# Altium PCB CryPCB.PcbDoc
Units mm, origin at the board's own origin, x right, y up, seen from the top; angles counter-clockwise.
Board outline 80 x 100 mm, 2 copper layers (Top Layer, Bottom Layer); 11 components, 5 nets, 20 pads, 3 vias.
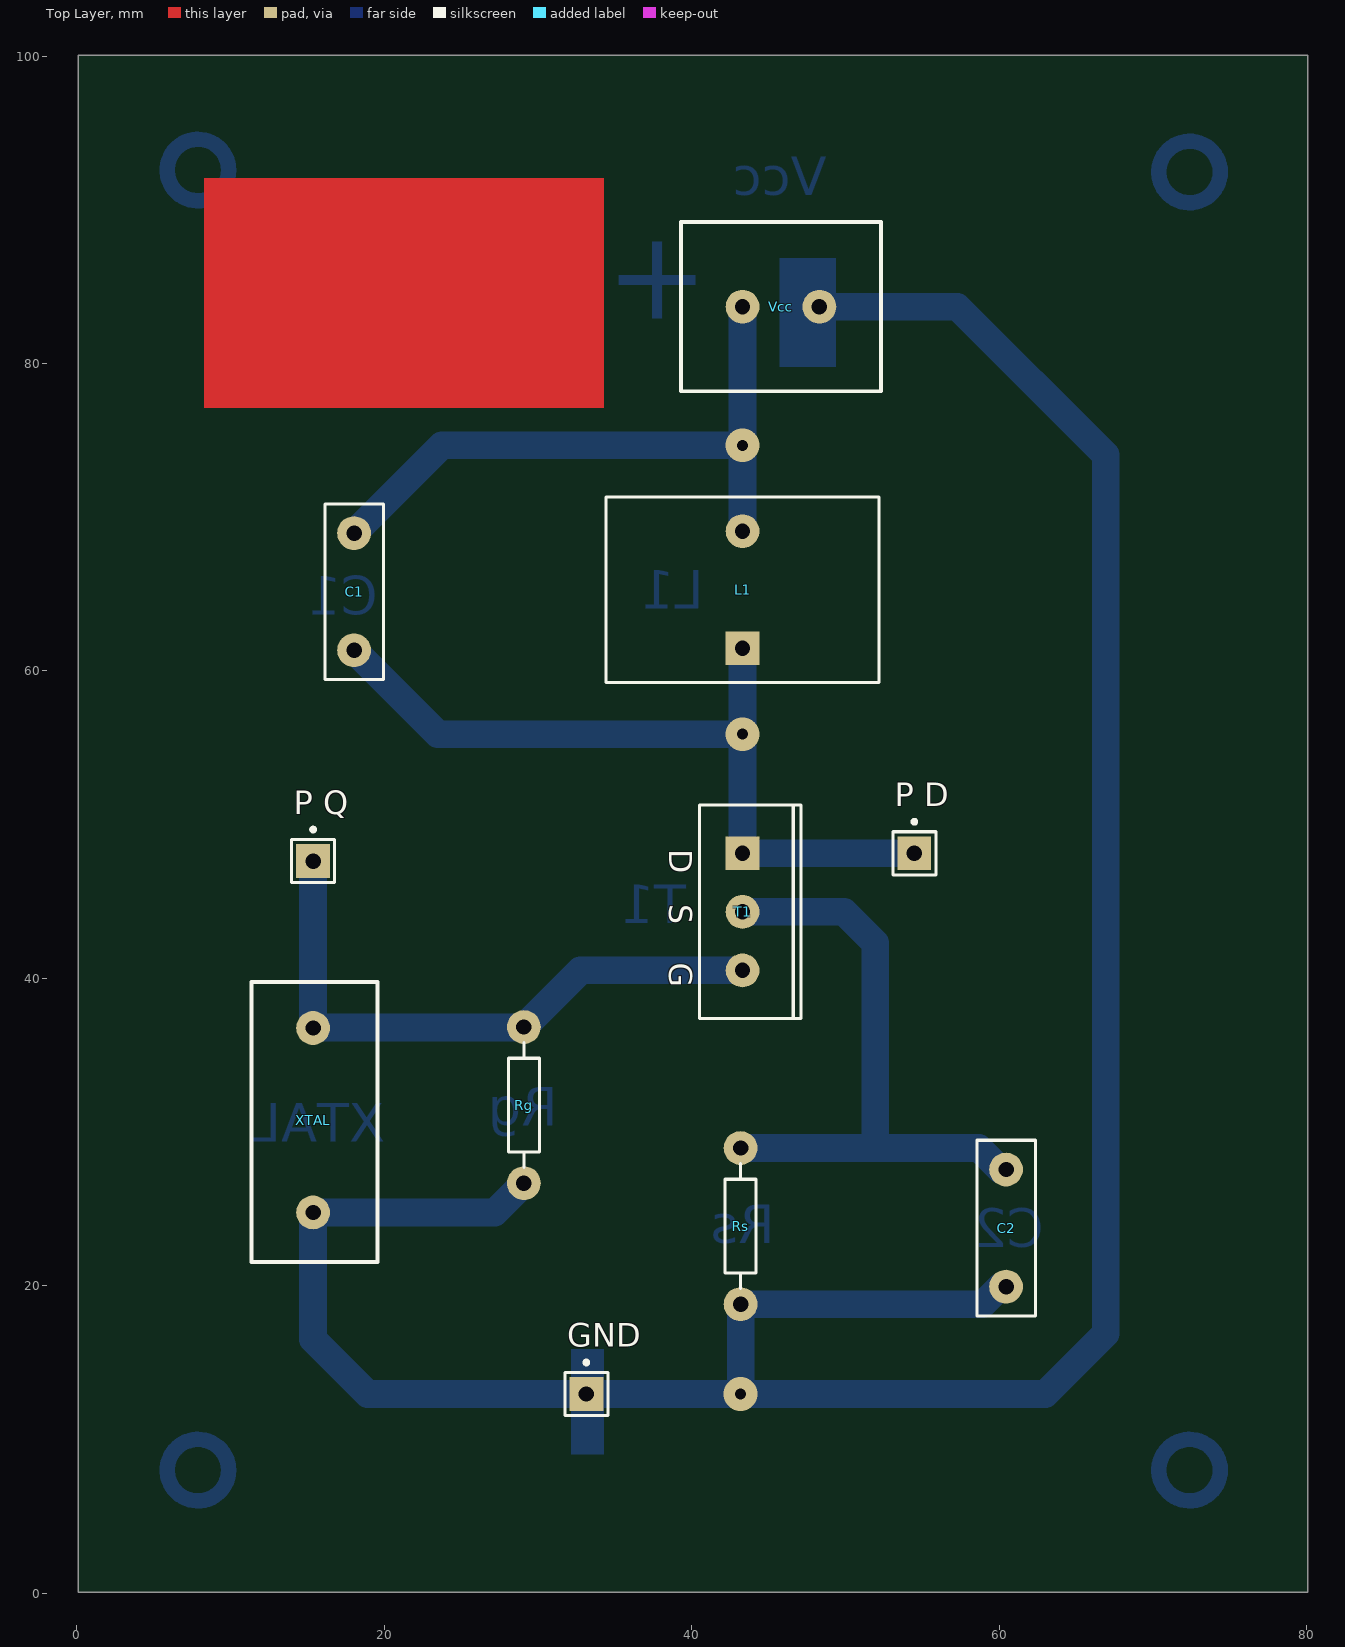
[diagram p0: Top Layer view]
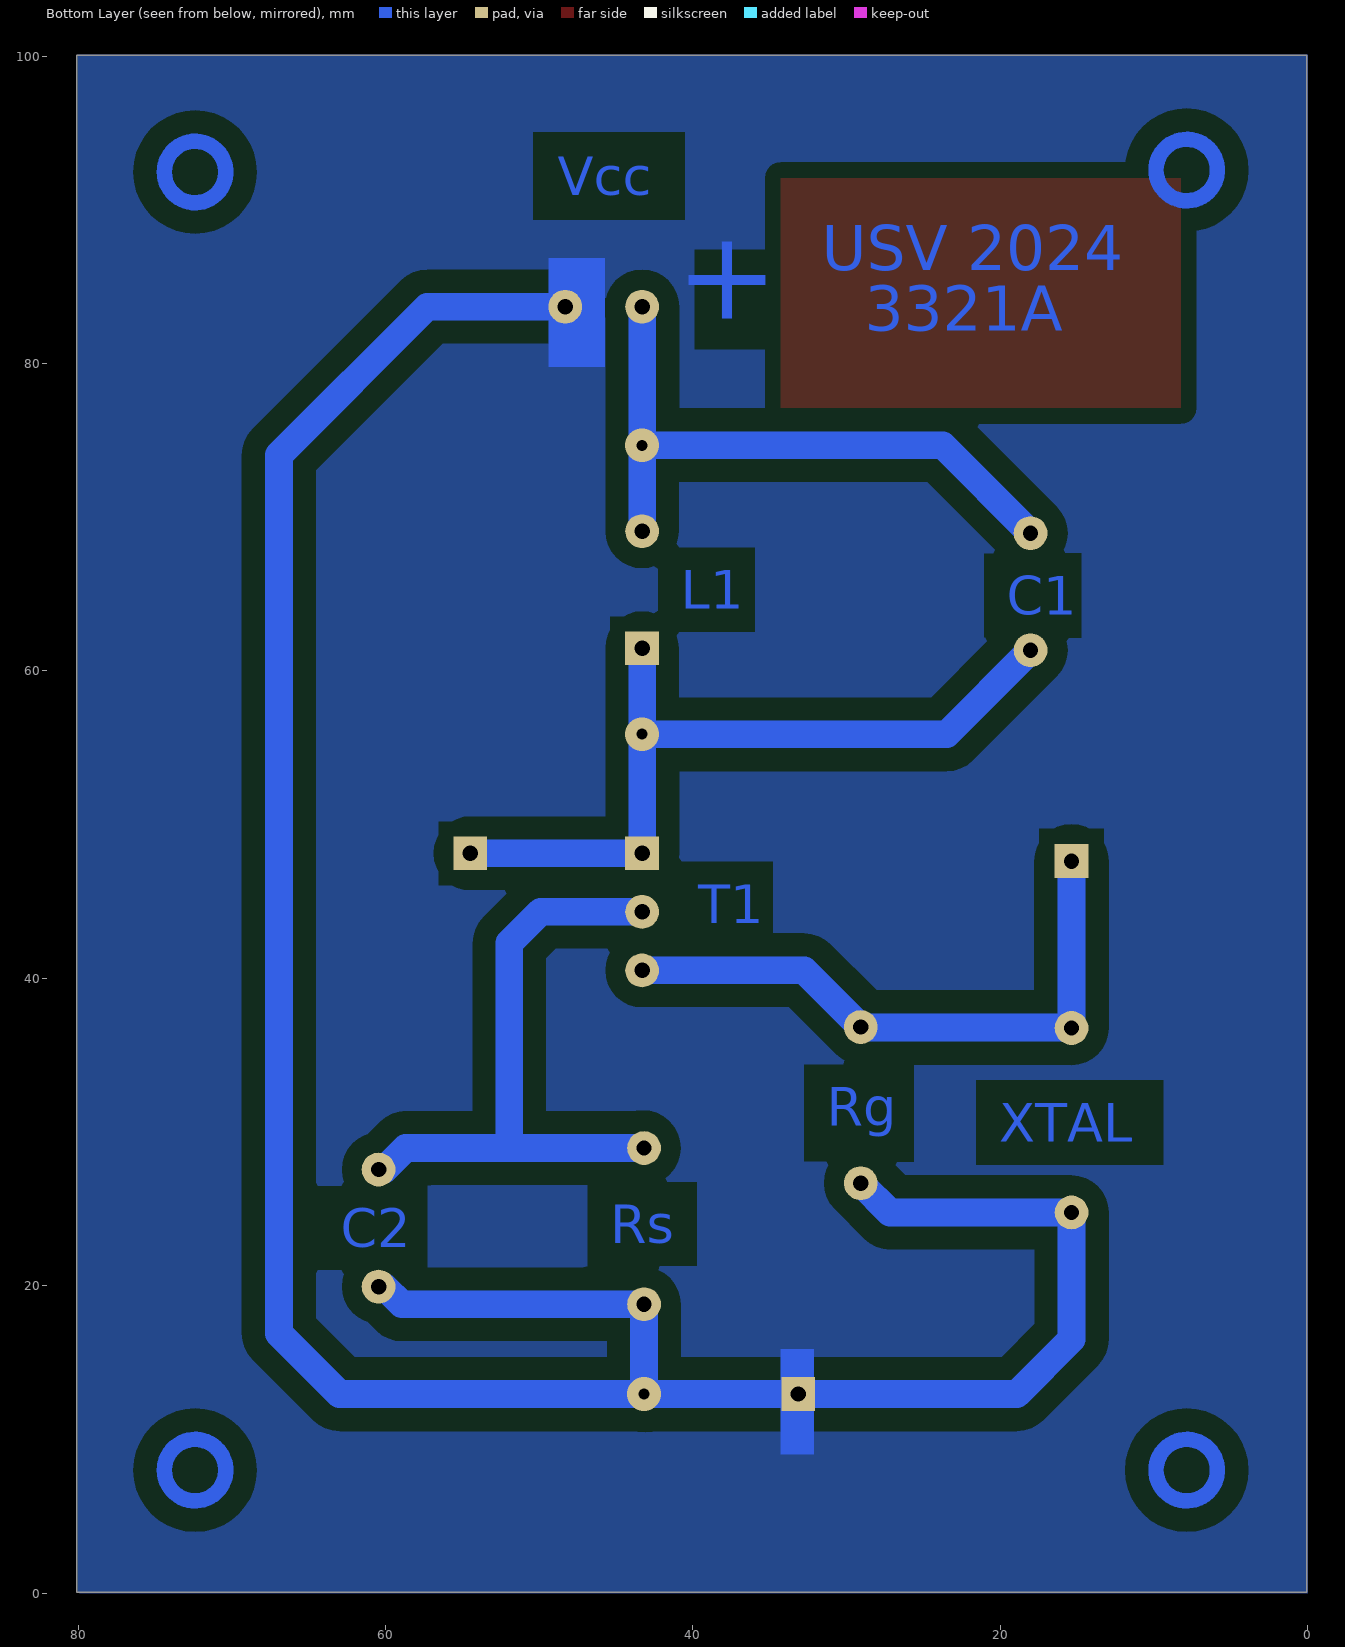
[diagram p1: Bottom Layer view, seen from below]

## Layer stack, top to bottom
Top Solder: solder mask 0.0102, Solder Resist, Dk 3.5
Top Layer: signal copper 0.0356
Dielectric 1: dielectric 0.32, FR-4, Dk 4.8
Bottom Layer: signal copper 0.0356
Bottom Solder: solder mask 0.0102, Solder Resist, Dk 3.5

## Board outline
0.08,0.041 0.08,100.041 80.08,100.041 80.08,0.041

## Design rules (kind name [scope] priority, off if disabled: settings)
Clearance [All] p1: gap=0.254 ignorepadtopadclearanceinfootprint=FALSE except(1: SMDPad-Fill SMDPad-Poly SMDPad-Region THPad-Fill THPad-Poly THPad-Region Via-Fill Via-Poly Via-Region Fill-Fill Fill-Poly Fill-Region Fill-Text Poly-Poly Poly-Region Poly-Text Region-Region Region-Text; 1.5: Arc-Fill Arc-Poly Arc-Region Track-Fill Track-Poly Track-Region)
PolygonConnect [All] p1: connectstyle=Relief reliefconductorwidth=0.254 reliefentries=4 polygonreliefangle="90 Angle" airgapwidth=0.254
RoutingVias [All] p1: holewidth=0.711 width=1.27 viastyle="Through Hole" minholewidth=0.711 minwidth=1.27 maxholewidth=0.711 maxwidth=4
SolderMaskExpansion [All] p1: expansion=0.102 istentingtop=FALSE
SupplyNets "Schematic Supply Nets" [InNet('GND')] p1: voltage=0.000
Width [All] p1: maxlimit=3 minlimit=0.254 preferedwidth=1.8 toplayer_maxwidth=1 toplayer_prefwidth=0.8 minimp=50.000000 maximp=50.000000 favimp=50.000000
30 further rules are at their usual default settings.

## Components (designator, comment, footprint, x,y, rotation, side; value= is the part's Value field where it differs from the comment)
C1 "Cap" RAD-0.3 18.034,65.151 r90 top value=1000uF
C2 "Cap" RAD-0.3 60.452,23.749 r90 top value=0.1uF
GND "" PIN1 33.147,12.954 r0 top
L1 "25uH" FP-FIT50-7-MFG 43.307,65.278 r90 top
"P D" "" PIN1 54.483,48.133 r0 top
"P Q" "" PIN1 15.367,47.625 r0 top
Rg "Res2" AXIAL-0.4 29.083,31.75 r90 top value=10M
Rs "Res2" AXIAL-0.4 43.18,23.876 r90 top value=2.7k
T1 "JFET-N" TO-254-AA 43.307,44.323 r270 top
Vcc "HeaderCustom1x1" PCBComponent_1#1 52.307,78.193 r90 top (schematic designator VCC)
XTAL "CRT" PCBComponent_1#2 15.367,24.765 r0 top (schematic designator *)

## Footprints (in the part's own frame and the unit in brackets; to place one, negate y for a bottom-side part, rotate by r counter-clockwise, add the part's x,y. Pads: shape width x height; smd on the part's side, far side on the other; paste and mask are expansions set on the pad)
AXIAL-0.4 [mm] "Axial Device, Thru-Hole; 2 Leads; 0.4 in Pin Spacing"
  round 2.2 hole 1: 1(-5.08,0) 2(5.08,0)
  silkscreen extent -4.06,-1.02 4.06,1.02
FP-FIT50-7-MFG [mm]
  rect 2.2x2.2 hole 1 paste-2539.97 mask+0: 1(-3.81,0)
  round 2.2 hole 1 paste-2539.97 mask+0: 2(3.81,0)
  silkscreen extent -6.03,-8.89 6.03,8.89, body extent -6.13,-8.99 6.13,8.99, height 0.25
PCBComponent_1#1 [mm]
  round 2.2 hole 1: 1(5.5,4) 2(5.5,9)
  silkscreen extent 0,0 11,13
PCBComponent_1#2 [mm]
  round 2.2 hole 1: 1(0,0) 2(0,12)
  silkscreen extent -4.01,-3.21 4.19,14.99
PIN1 [mm] "Connector; Plug"
  rect 2.2x2.2 hole 1: 1(0,0)
  silkscreen extent -1.4,-1.4 1.4,2.17
RAD-0.3 [mm] "Radial Cap, Thru-Hole; 2 Leads; 0.3 in Pin Spacing"
  round 2.2 hole 1: 1(-3.81,0) 2(3.81,0)
  silkscreen extent -5.71,-1.91 5.71,1.91
TO-254-AA [mm] "TO, Thru-Hole, Vertical, Heatsink Mounted; 3 In-Line Leads; Pitch 3.81 mm"
  rect 2.2x2.2 hole 1: 1(-3.81,0)
  round 2.2 hole 1: 2(0,0) 3(3.81,0)
  silkscreen extent -6.95,-2.8 6.95,3.8

## Part data
C1 C2: library part CMP-001-00083-1, "Capacitor", Case/Package="Radial Cap, Thru-Hole; 2 Leads; 0.3 in Pin Spacing", Component Type=Standard, Design Item ID=Cap, LatestRevisionDate=17-Jul-2002, LatestRevisionNote="Re-released for DXP Platform.", PackageReference=RAD-0.3, Pins=2, Published=8-Jun-2000, Publisher="Altium Limited", Source="Miscellaneous Devices.SchLib"
GND "P D" "P Q": library part CMP-022-000003-1, "Plug", Component Type=Standard, Design Item ID=Plug, LatestRevisionDate=17-Jul-2002, LatestRevisionNote="Re-released for DXP Platform.", Pin Count=1, Publisher="Altium Limited", Source="Miscellaneous Connectors.SchLib"
L1: library part CMP-75789-000001-1, "FIXED IND 8.86UH 8.1A 11 MOHM TH", Case/Package=Radial, Current Rating=8.1A, DC Resistance (DCR)=11mR, Inductance=8.86uH, Package Quantity=1, Resistance=0.011R, Test Frequency=10kHz, Tolerance=10%, Height=0.75inch, Lead Free="Lead Free", Lead Pitch=7.62mm, Length=0.7inch, Max DC Current=8.1A, Mount="Through Hole", Number of Pins=2, Packaging=Bulk, RoHS Compliant=Yes, Series=FIT, Shielding=Unshielded, Termination="Through Hole", Weight=0.192oz, Width=0.475inch
Rg Rs: library part CMP-009-00190-1, "Resistor", Case/Package="Axial Device, Thru-Hole; 2 Leads; 0.4 in Pin Spacing", Component Type=Standard, Design Item ID=Res2, LatestRevisionDate=17-Jul-2002, LatestRevisionNote="Re-released for DXP Platform.", PackageReference=AXIAL-0.4, Pins=2, Published=8-Jun-2000, Publisher="Altium Limited", Source="Miscellaneous Devices.SchLib"
T1: library part CMP-019-000008-1, "N-Channel JFET", Code_JEDEC=TO-254-AA, Component Type=Standard, Design Item ID=JFET-N, LatestRevisionDate=17-Jul-2002, LatestRevisionNote="Re-released for DXP Platform.", PackageReference=TO-254-AA, Pin Count=3, Published=8-Jun-2000, Publisher="Altium Limited", Source="Miscellaneous Devices.SchLib"
Vcc: library part CMP-041-000000-2, Design Item ID=Component_1, Source=HeaderCustom0_5.SchLib
XTAL: library part CMP-039-000001-1, Design Item ID=Component_1, Source=Crist1Mhz.SchLib

## Via types
v1: diameter 2.2, hole 0.711, Top Layer to Bottom Layer, 3 vias

## Nets (pads, with @x,y where several pads share a name; then routed paths per layer and width w, separated by ;. In a path a pad name is that pad's centre, name@x,y a point inside that pad or via, vN(x,y) a via of type N, cw(c..) or ccw(c..) an arc to the next point about the centre after c; other vN are vias at no path point)
GND: C2.1 GND.1 Rg.1 Rs.1 Vcc.1 XTAL.1 | length 181
  Bottom Layer w1.8: Rg.1 27.178,24.765 XTAL.1 15.367,16.51 18.923,12.954 GND.1 v1(43.18,12.954) ; v1@43.103,12.877 v1(43.18,12.954) ; Vcc.1@48.26,83.74 Vcc.1 57.277,83.693 66.929,74.041 66.929,16.891 62.992,12.954 v1(43.18,12.954) ; C2.1 60.073,19.939 58.93,18.796 Rs.1 v1(43.18,12.954)
Net*_2: "P Q.1" Rg.2 T1.3 XTAL.2 | length 40.4
  Bottom Layer w1.8: 15.367,47.625 XTAL.2 15.4,36.798 29.051,36.798 Rg.2 32.766,40.513 T1.3
NetC1_1: "P D.1" C1.1 L1.1 T1.1 | length 52
  Bottom Layer w1.8: C1.1 23.495,55.88 v1(43.307,55.88) ; L1.1 v1(43.307,55.88) ; 54.483,48.133 T1.1 v1(43.307,55.88)
NetC1_2: C1.2 L1.2 Vcc.2 | length 42.2
  Bottom Layer w1.8: C1.2 23.749,74.676 v1(43.307,74.676) ; L1.2 v1(43.307,74.676) ; Vcc.2 v1(43.307,74.676)
NetC2_2: C2.2 Rs.2 T1.2 | length 40.8
  Bottom Layer w1.8: Rs.2@43.243,29.019 Rs.2 51.943,28.956 ; T1.2 49.911,44.323 51.943,42.291 51.943,28.956 ; C2.2 60.073,27.559 58.676,28.956 51.943,28.956
copper on no net: | length 50.3
  Bottom Layer w1: 9.874,8.001 ccw(c7.874,8.001) 9.874,8.001 ; 9.874,92.583 ccw(c7.874,92.583) 9.874,92.583 ; 74.39,8.001 ccw(c72.39,8.001) 74.39,8.001 ; 74.39,92.456 ccw(c72.39,92.456) 74.39,92.456

## Polygon pours and split planes (outlines as drawn)
no net on Bottom Layer "NONET_L02_P000" (solid, pour order 0): 0,0 79.883,0 80.01,0.127 80.01,100.076 0,100.076

## Other copper
Top Layer:
  rectangle: 8.255,77.089 34.29,92.075
Bottom Layer:
  rectangle net GND: 32.131,9.017 34.29,15.875
  rectangle net GND: 45.72,79.756 49.403,86.868
  text "USV 2024" at 31.623,85.09 h5
  text "3321A" at 28.829,81.153 h5
  text "+" at 34.417,80.991 h10

## Silkscreen, mask and mechanical layers (free items; w line width, h text height)
Mechanical 1:
  the board outline again, w0.554

## Text inside footprints (layer, text, board x,y; h text height)
T1: Top Overlay "G" at 38.532,41.013 h1.5 r270; Top Overlay "S" at 38.532,44.823 h1.5 r270; Top Overlay "D" at 38.532,48.383 h1.5 r270